# Altium PCB AT32.PcbDoc (part 9 of 9)
Units mm, origin at the board's own origin, x right, y up, seen from the top; angles counter-clockwise.
Board outline 152.1 x 84.6 mm, 2 copper layers (Top Layer, Bottom Layer); 49 components, 58 nets, 223 pads, 0 vias.
Unrouted connection lines stored in the file: 3.
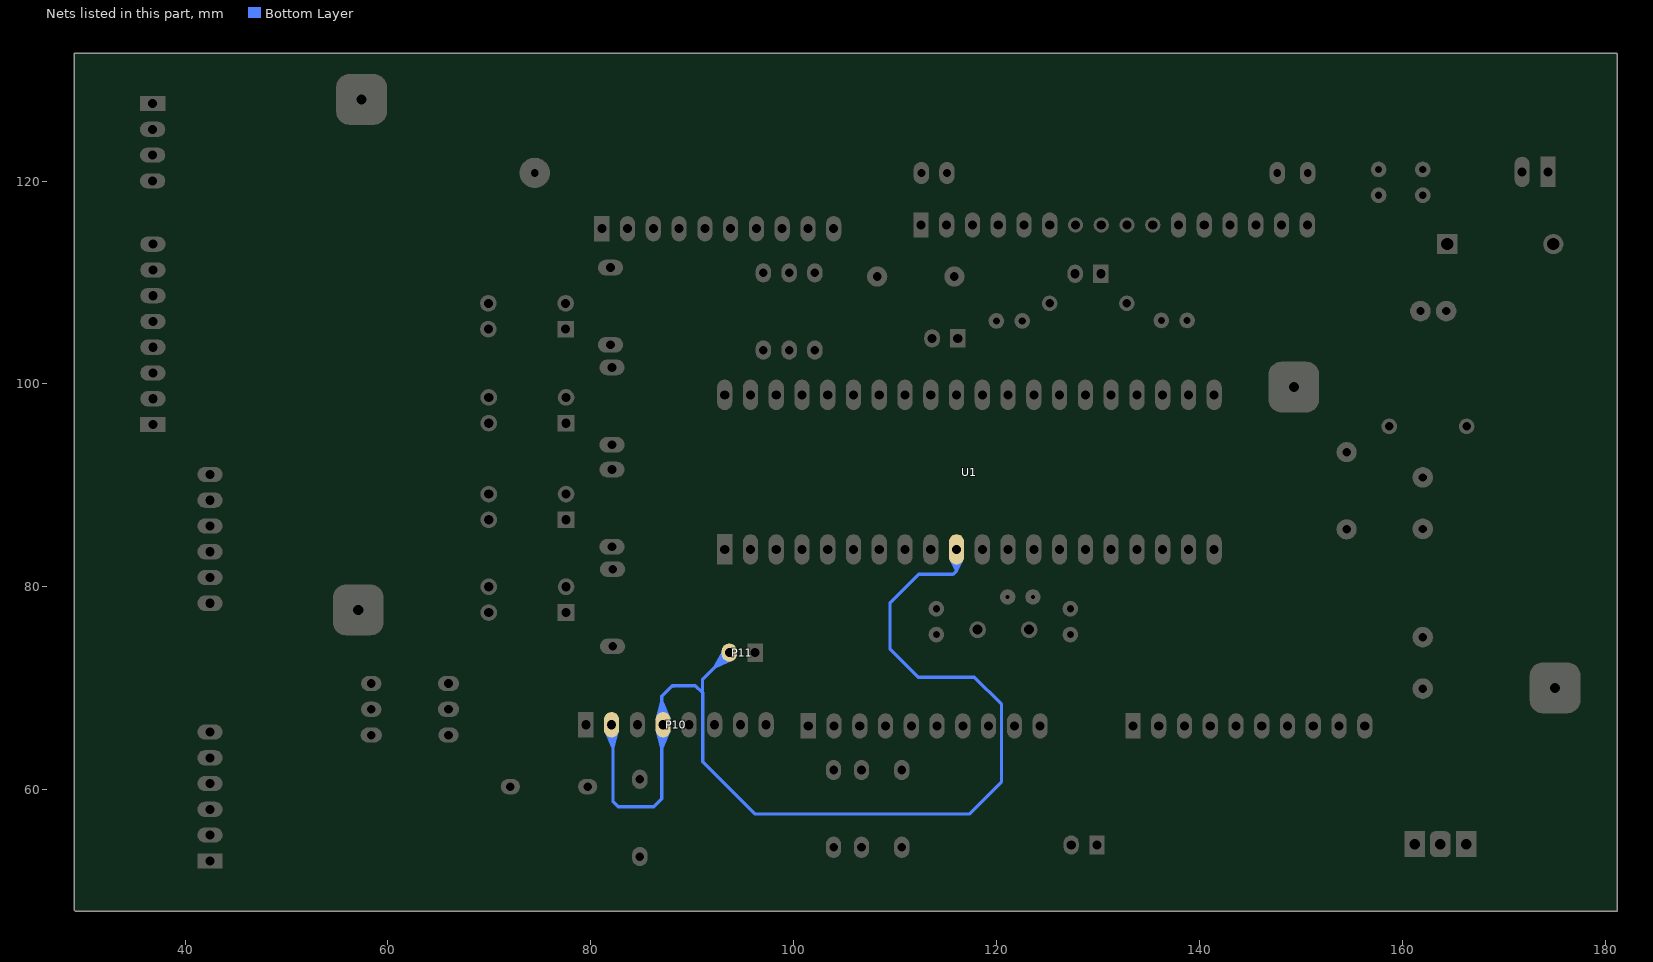
[diagram p9: the nets of this part, all layers, seen from the top]

## Nets (pads, with @x,y where several pads share a name; then routed paths per layer and width w, separated by ;. In a path a pad name is that pad's centre, name@x,y a point inside that pad or via, vN(x,y) a via of type N, cw(c..) or ccw(c..) an arc to the next point about the centre after c; other vN are vias at no path point) (continued)
VCC2: P10.2 P10.4 P11.2 U1.10 | length 420.3
  Bottom Layer w0.3: 88.175,70.183 88.248,70.256 ; 91,69.6 91,70.848 P11.2@93.664,73.512 ; 92.384,72.232 cw(c93.664,70.951) P11.2@93.664,72.762 ; 92.698,72.546 ccw(c91.861,73.382) P11.2@93.044,73.382 ; 92.896,72.744 cw(c93.664,71.976) P11.2@93.664,73.062 ; 92.258,72.106 P11.2@94,72.861 ; 92.258,72.106 P11.2@93.178,73.767 ; 92.258,72.106 P11.2@93.858,73.128 ; 92.258,72.106 P11.2@93.43,73.6 ; 92.258,72.106 P11.2@93.664,73.382 ; 92.258,72.106 P11.2@94,72.861 ; 92.258,72.106 P11.2@93.178,73.767 ; 92.258,72.106 P11.2@93.858,73.128 ; 92.258,72.106 P11.2@93.43,73.6 ; 92.258,72.106 P11.2@93.664,73.382 ; 92.258,72.106 P11.2@94,72.861 ; 92.258,72.106 P11.2@93.178,73.767 ; 92.258,72.106 P11.2@93.858,73.128 ; 92.258,72.106 P11.2@93.43,73.6 ; 92.258,72.106 P11.2@93.664,73.382 ; 92.258,72.106 P11.2@94,72.861 ; 92.258,72.106 P11.2@93.178,73.767 ; 92.258,72.106 P11.2@93.858,73.128 ; 92.258,72.106 P11.2@93.43,73.6 ; 92.258,72.106 P11.2@93.664,73.382 ; 92.258,72.106 P11.2@94,72.861 ; 92.258,72.106 P11.2@93.178,73.767 ; 92.258,72.106 P11.2@93.858,73.128 ; 92.258,72.106 P11.2@93.43,73.6 ; 92.258,72.106 P11.2@93.664,73.382 ; 92.258,72.106 P11.2@94,72.861 ; 92.258,72.106 P11.2@93.178,73.767 ; 92.258,72.106 P11.2@93.858,73.128 ; 92.258,72.106 P11.2@93.43,73.6 ; 92.258,72.106 P11.2@93.664,73.382 ; 92.258,72.106 P11.2@94,72.861 ; 92.258,72.106 P11.2@93.178,73.767 ; 92.258,72.106 P11.2@93.858,73.128 ; 92.258,72.106 P11.2@93.43,73.6 ; 92.258,72.106 P11.2@93.664,73.382
  Bottom Layer w0.33: P10.2@81.641,65.492 cw(c80.293,64.144) 82.2,64.144 ; P10.2@81.875,65.726 cw(c81.089,64.94) 82.2,64.94 ; P10.2@82.055,66.406 82.2,66.261 82.2,58.8 82.7,58.3 86.2,58.3 87,59.1 87,66 P10.4@87.3,66.3 ; 82.2,64.844 cw(c83.117,64.844) P10.2@82.469,65.492 ; P10.2@82.31,65.908 82.199,64.168 ; P10.4@86.552,65.853 87.001,64.167 ; P10.4@86.721,65.492 cw(c86.049,64.82) 87,64.82 ; P10.4@86.721,67.32 ccw(c86.049,67.992) 87,67.992 ; 87,64.964 cw(c88.077,64.964) P10.4@87.315,65.726 ; P10.4@87,66.5 87,69.218 88.038,70.256 88.248,70.256 90.314,70.256 91.03,69.54 91.03,62.77 96.2,57.6 117.3,57.6 120.5,60.8 120.5,68.4 117.8,71.1 112.3,71.1 109.497,73.903 109.497,78.397 112.333,81.233 115.721,81.233 116.066,81.578 ; 87,67.848 ccw(c88.077,67.848) P10.4@87.315,67.086 ; P10.4@87.387,65.868 87.001,64.167 ; P10.4@87.549,65.492 ccw(c88.873,64.168) 87,64.168 ; P10.4@87.549,67.32 cw(c88.873,68.644) 87,68.644 ; P10.4@87.702,65.764 87.001,64.167 ; U1.10@115.664,82.512 cw(c114.78,81.578) 116.066,81.578 cw(c117.352,81.578) U1.10@116.468,82.512 ; U1.10@116.066,83.687 116.066,81.578 ; P10.2@81.488,65.761 82.2,64.159 ; P10.2@81.488,65.761 82.2,64.159 ; P10.2@81.488,65.761 82.2,64.159 ; P10.2@81.488,65.761 82.2,64.159 ; P10.2@81.488,65.761 82.2,64.159 ; P10.2@81.488,65.761 82.199,64.168 ; P10.2@81.488,65.761 82.2,64.159 ; P10.2@81.803,65.867 82.2,64.159 ; P10.2@81.803,65.867 82.2,64.159 ; P10.2@81.803,65.867 82.2,64.159 ; P10.2@81.803,65.867 82.2,64.159 ; P10.2@81.803,65.867 82.2,64.159 ; P10.2@81.803,65.866 82.199,64.168 ; P10.2@81.803,65.867 82.2,64.159 ; P10.2@82.055,65.906 82.2,64.159 ; P10.2@82.055,65.906 82.2,64.159 ; P10.2@82.055,65.906 82.2,64.159 ; P10.2@82.055,65.906 82.2,64.159 ; P10.2@82.055,65.906 82.2,64.159 ; P10.2@82.055,65.906 82.199,64.168 ; P10.2@82.055,65.906 82.2,64.159 ; 82.2,64.159 P10.2@82.638,65.856 ; 82.2,64.159 P10.2@82.31,65.909 ; 82.2,64.159 P10.2@82.638,65.856 ; 82.2,64.159 P10.2@82.31,65.909 ; 82.2,64.159 P10.2@82.638,65.856 ; 82.2,64.159 P10.2@82.31,65.909 ; 82.2,64.159 P10.2@82.638,65.856 ; 82.2,64.159 P10.2@82.31,65.909 ; 82.2,64.159 P10.2@82.638,65.856 ; 82.2,64.159 P10.2@82.31,65.909 ; 82.2,64.159 P10.2@82.638,65.856 ; 82.2,64.159 P10.2@82.31,65.909 ; 82.199,64.168 P10.2@82.638,65.856 ; P10.4@86.552,65.853 87,64.159 ; P10.4@86.552,65.853 87,64.159 ; P10.4@86.552,65.853 87,64.159 ; P10.4@86.552,65.853 87,64.159 ; P10.4@86.552,65.853 87,64.159 ; P10.4@86.552,65.853 87,64.159 ; P10.4@86.552,66.959 87,68.648 ; P10.4@86.552,66.959 87,68.648 ; P10.4@86.552,66.959 87,68.648 ; P10.4@86.552,66.959 87,68.648 ; P10.4@86.552,66.959 87,68.648 ; P10.4@86.552,66.959 87,68.645 ; P10.4@86.552,66.959 87,68.648 ; P10.4@86.88,65.907 87,64.159 ; P10.4@86.88,65.907 87,64.159 ; P10.4@86.88,65.907 87,64.159 ; P10.4@86.88,65.907 87,64.159 ; P10.4@86.88,65.907 87,64.159 ; P10.4@86.88,65.907 87.001,64.167 ; P10.4@86.88,65.907 87,64.159 ; P10.4@86.88,66.905 87,68.648 ; P10.4@86.88,66.905 87,68.648 ; P10.4@86.88,66.905 87,68.648 ; P10.4@86.88,66.905 87,68.648 ; P10.4@86.88,66.905 87,68.648 ; P10.4@86.88,66.905 87,68.645 ; P10.4@86.88,66.905 87,68.648 ; 87,64.159 P10.4@87.703,65.764 ; 87,64.159 P10.4@87.387,65.868 ; 87,64.159 P10.4@87.135,65.906 ; 87,64.159 P10.4@87.703,65.764 ; 87,64.159 P10.4@87.387,65.868 ; 87,64.159 P10.4@87.135,65.906 ; 87,64.159 P10.4@87.703,65.764 ; 87,64.159 P10.4@87.387,65.868 ; 87,64.159 P10.4@87.135,65.906 ; 87,64.159 P10.4@87.703,65.764 ; 87,64.159 P10.4@87.387,65.868 ; 87,64.159 P10.4@87.135,65.906 ; 87,64.159 P10.4@87.703,65.764 ; 87,64.159 P10.4@87.387,65.868 ; 87,64.159 P10.4@87.135,65.906 ; 87,64.159 P10.4@87.703,65.764 ; 87,64.159 P10.4@87.387,65.868 ; 87,64.159 P10.4@87.135,65.906 ; 87.001,64.167 P10.4@87.135,65.906 ; 87,68.645 P10.4@87.702,67.048 ; 87,68.645 P10.4@87.387,66.944 ; 87,68.645 P10.4@87.135,66.906 ; 87,68.648 P10.4@87.702,67.048 ; 87,68.648 P10.4@87.387,66.944 ; 87,68.648 P10.4@87.135,66.906 ; 87,68.648 P10.4@87.702,67.048 ; 87,68.648 P10.4@87.387,66.944 ; 87,68.648 P10.4@87.135,66.906 ; 87,68.648 P10.4@87.702,67.048 ; 87,68.648 P10.4@87.387,66.944 ; 87,68.648 P10.4@87.135,66.906 ; 87,68.648 P10.4@87.702,67.048 ; 87,68.648 P10.4@87.387,66.944 ; 87,68.648 P10.4@87.135,66.906 ; 87,68.648 P10.4@87.702,67.048 ; 87,68.648 P10.4@87.387,66.944 ; 87,68.648 P10.4@87.135,66.906 ; 87,68.648 P10.4@87.702,67.048 ; 87,68.648 P10.4@87.387,66.944 ; 87,68.648 P10.4@87.135,66.906 ; U1.10@115.495,82.811 116.066,81.578 ; U1.10@115.495,82.811 116.066,81.578 ; U1.10@115.495,82.811 116.066,81.578 ; U1.10@115.495,82.811 116.066,81.578 ; U1.10@115.495,82.811 116.066,81.578 ; U1.10@115.495,82.811 116.066,81.578 ; U1.10@115.495,82.811 116.066,81.578 ; U1.10@115.812,82.913 116.066,81.578 ; U1.10@115.812,82.913 116.066,81.578 ; U1.10@115.812,82.913 116.066,81.578 ; U1.10@115.812,82.913 116.066,81.578 ; U1.10@115.812,82.913 116.066,81.578 ; U1.10@115.812,82.913 116.066,81.578 ; U1.10@115.812,82.913 116.066,81.578 ; 116.066,81.578 U1.10@116.637,82.811 ; 116.066,81.578 U1.10@116.32,82.913 ; 116.066,81.578 U1.10@116.066,82.937 ; 116.066,81.578 U1.10@116.637,82.811 ; 116.066,81.578 U1.10@116.32,82.913 ; 116.066,81.578 U1.10@116.066,82.937 ; 116.066,81.578 U1.10@116.637,82.811 ; 116.066,81.578 U1.10@116.32,82.913 ; 116.066,81.578 U1.10@116.066,82.937 ; 116.066,81.578 U1.10@116.637,82.811 ; 116.066,81.578 U1.10@116.32,82.913 ; 116.066,81.578 U1.10@116.066,82.937 ; 116.066,81.578 U1.10@116.637,82.811 ; 116.066,81.578 U1.10@116.32,82.913 ; 116.066,81.578 U1.10@116.066,82.937 ; 116.066,81.578 U1.10@116.637,82.811 ; 116.066,81.578 U1.10@116.32,82.913 ; 116.066,81.578 U1.10@116.066,82.937 ; 116.066,81.578 U1.10@116.637,82.811 ; 116.066,81.578 U1.10@116.32,82.913 ; 116.066,81.578 U1.10@116.066,82.937
pads on no net: P9.7 P9.8 P9.9 P9.10 P100.7 P100.8 P100.9 P100.10
copper on no net: | length 475.9
  Bottom Layer w0.33: 29.081,48.1 29.1,132.6 ; 29.1,48.02 181.2,48 ; 29.1,132.593 181.2,132.66 ; 181.2,83.8 181.211,81.31 ; 181.211,48.034 181.211,132.7

## Keep-outs
Keep-Out Layer:
  lines w0.33: 29.081,48.1 29.1,132.6 ; 29.1,48.02 181.2,48 181.2,132.7 ; 29.1,132.593 181.2,132.66

## Other copper
Bottom Layer:
  text "ELASA.IR" at 151.21,54.113 h4
  text "AT32" at 148.81,50.113 h4

## Silkscreen, mask and mechanical layers (free items; w line width, h text height)
Top Overlay:
  lines w0.33: 29.081,48.1 29.1,132.6 ; 29.1,48.02 181.2,48 ; 29.1,132.593 181.2,132.66 ; 181.211,48.034 181.211,132.7
  text "----" at 43.3,128.4 h3 r180
  text "Gnd" at 47.3,128.2 h1.3 r180
  text "Gnd" at 111.945,125.747 h1.2 r270
  text "Vcc" at 114.739,125.747 h1.2 r270
  text "Vcc" at 147.759,125.747 h1.2 r270
  text "Gnd" at 150.299,125.747 h1.2 r270
  text "----" at 43.4,125.4 h3 r180
  text "A2" at 46.412,125.397 h1.3 r180
  text "RS" at 117.339,124.647 h1.2 r270
  text "EN" at 122.219,124.607 h1.2 r270
  text "C7" at 100.72,124.12 h1.3 r270
  text "A2" at 85.623,124.112 h1.3 r270
  text "A3" at 88.183,124.112 h1.3 r270
  text "A4" at 90.743,124.112 h1.3 r270
  text "A5" at 93.223,124.112 h1.3 r270
  text "A6" at 95.823,124.112 h1.3 r270
  text "A7" at 98.363,124.112 h1.3 r270
  text "C6" at 103.48,124.08 h1.3 r270
  text "A0" at 80.383,124.012 h1.3 r270
  text "A1" at 82.903,123.912 h1.3 r270
  text "C3" at 137.372,123.285 h1.2 r270
  text "C2" at 140.085,123.158 h1.2 r270
  text "C1" at 142.598,123.158 h1.2 r270
  text "C0" at 145.138,123.158 h1.2 r270
  text "C5" at 119.8,123 h1.2 r270
  text "C4" at 124.7,123 h1.2 r270
  text "----" at 43.5,122.8 h3 r180
  text "A1" at 46.512,122.797 h1.3 r180
  text "----" at 85.5,121.1 h3 r270
  text "----" at 88,121.1 h3 r270
  text "----" at 90.6,121.1 h3 r270
  text "----" at 93.2,121.1 h3 r270
  text "----" at 95.7,121.1 h3 r270
  text "----" at 98.2,121.1 h3 r270
  text "----" at 100.7,121.1 h3 r270
  text "----" at 103.2,121.1 h3 r270
  text "----" at 80.3,121 h3 r270
  text "----" at 82.9,120.9 h3 r270
  text "----" at 139.9,120.4 h3 r270
  text "----" at 43.5,120.3 h3 r180
  text "----" at 119.6,120.3 h3 r270
  text "----" at 124.4,120.3 h3 r270
  text "----" at 124.4,120.3 h3 r270
  text "----" at 137.1,120.3 h3 r270
  text "----" at 142.4,120.3 h3 r270
  text "----" at 144.9,120.3 h3 r270
  text "A0" at 46.512,120.217 h1.3 r180
  text "+" at 176.9,119.4 h3
  text "-" at 166.7,119.2 h3
  text "Vin" at 171.8,117.6 h1
  text "G4" at 31.305,112.603 h1.2
  text "04" at 31.205,110.436 h1.2
  text "G3" at 31.205,107.296 h1.2
  text "03" at 31.205,105.256 h1.2
  text "WWW.ELASA.IR" at 66.3,104.3 h1.5 r270
  text "G2" at 31.205,102.143 h1.2
  text "O2" at 31.205,100.203 h1.2
  text "G1" at 31.278,97.136 h1.2
  text "O1" at 31.378,94.996 h1.2
  text "clk" at 117.265,78.325 h0.9
  text "------" at 81.4,64.9 h3 r270
  text "------" at 89.1,64.9 h3 r270
  text "------" at 91.6,64.9 h3 r270
  text "------" at 94.1,64.9 h3 r270
  text "------" at 96.7,64.9 h3 r270
  text "----" at 78.9,64.8 h3 r270
  text "------" at 86.5,64.8 h3 r270
  text "-----" at 153.3,64.8 h3 r270
  text "-----" at 155.8,64.8 h3 r270
  text "-----" at 140.5,64.7 h3 r270
  text "-----" at 143,64.7 h3 r270
  text "-----" at 145.6,64.7 h3 r270
  text "-----" at 148.2,64.7 h3 r270
  text "-----" at 150.7,64.7 h3 r270
  text "------" at 100.8,64.6 h3 r270
  text "------" at 111,64.6 h3 r270
  text "------" at 123.7,64.6 h3 r270
  text "-----" at 132.8,64.6 h3 r270
  text "-----" at 135.3,64.6 h3 r270
  text "-----" at 138,64.6 h3 r270
  text "------" at 116,64.5 h3 r270
  text "------" at 118.5,64.5 h3 r270
  text "------" at 113.5,64.4 h3 r270
  text "D1" at 135.708,59.875 h1.3 r270
  text "D2" at 138.148,59.875 h1.3 r270
  text "D3" at 140.708,59.875 h1.3 r270
  text "D4" at 143.268,59.875 h1.3 r270
  text "D5" at 145.908,59.875 h1.3 r270
  text "D6" at 148.388,59.875 h1.3 r270
  text "D7" at 150.86,59.86 h1.3 r270
  text "D0" at 132.948,59.835 h1.3 r270
  text "Gnd" at 153.522,59.835 h1.3 r270
  text "Gnd" at 156.189,59.835 h1.3 r270
  text "Gnd" at 123.925,59.035 h1.3 r270
  text "B0" at 100.938,58.908 h1.3 r270
  text "B4" at 111.298,58.908 h1.3 r270
  text "B5" at 113.658,58.908 h1.3 r270
  text "B6" at 116.078,58.908 h1.3 r270
  text "B7" at 118.845,58.908 h1.3 r270
  text "Vcc" at 79.134,58.855 h1.3 r270
  text "Vc2" at 81.674,58.855 h1.3 r270
  text "Vc2" at 86.627,58.855 h1.3 r270
  text "Rs" at 89.294,58.855 h1.3 r270
  text "Sck" at 91.961,58.855 h1.3 r270
  text "Mis" at 94.501,58.728 h1.3 r270
  text "Mos" at 97.168,58.728 h1.3 r270
  text "ELASA.IR" at 138.81,52.042 h3
  text "B1" at 103.538,51.908 h0.9 r270
  text "B2" at 106.238,51.908 h1.3 r270
  text "B3" at 108.658,51.908 h1.3 r270
  text "Reset" at 126.8,51.8 h0.9
  text "Gnd" at 84.5,51.7 h0.9 r270

## Text inside footprints (layer, text, board x,y; h text height)
C6: Top Overlay "+" at 161.266,70.464 h0.91 r90
C7: Top Overlay "+" at 161.266,86.212 h0.91 r90